# EAGLE board Advika30_CLEAN (EAGLE 9.7.0)
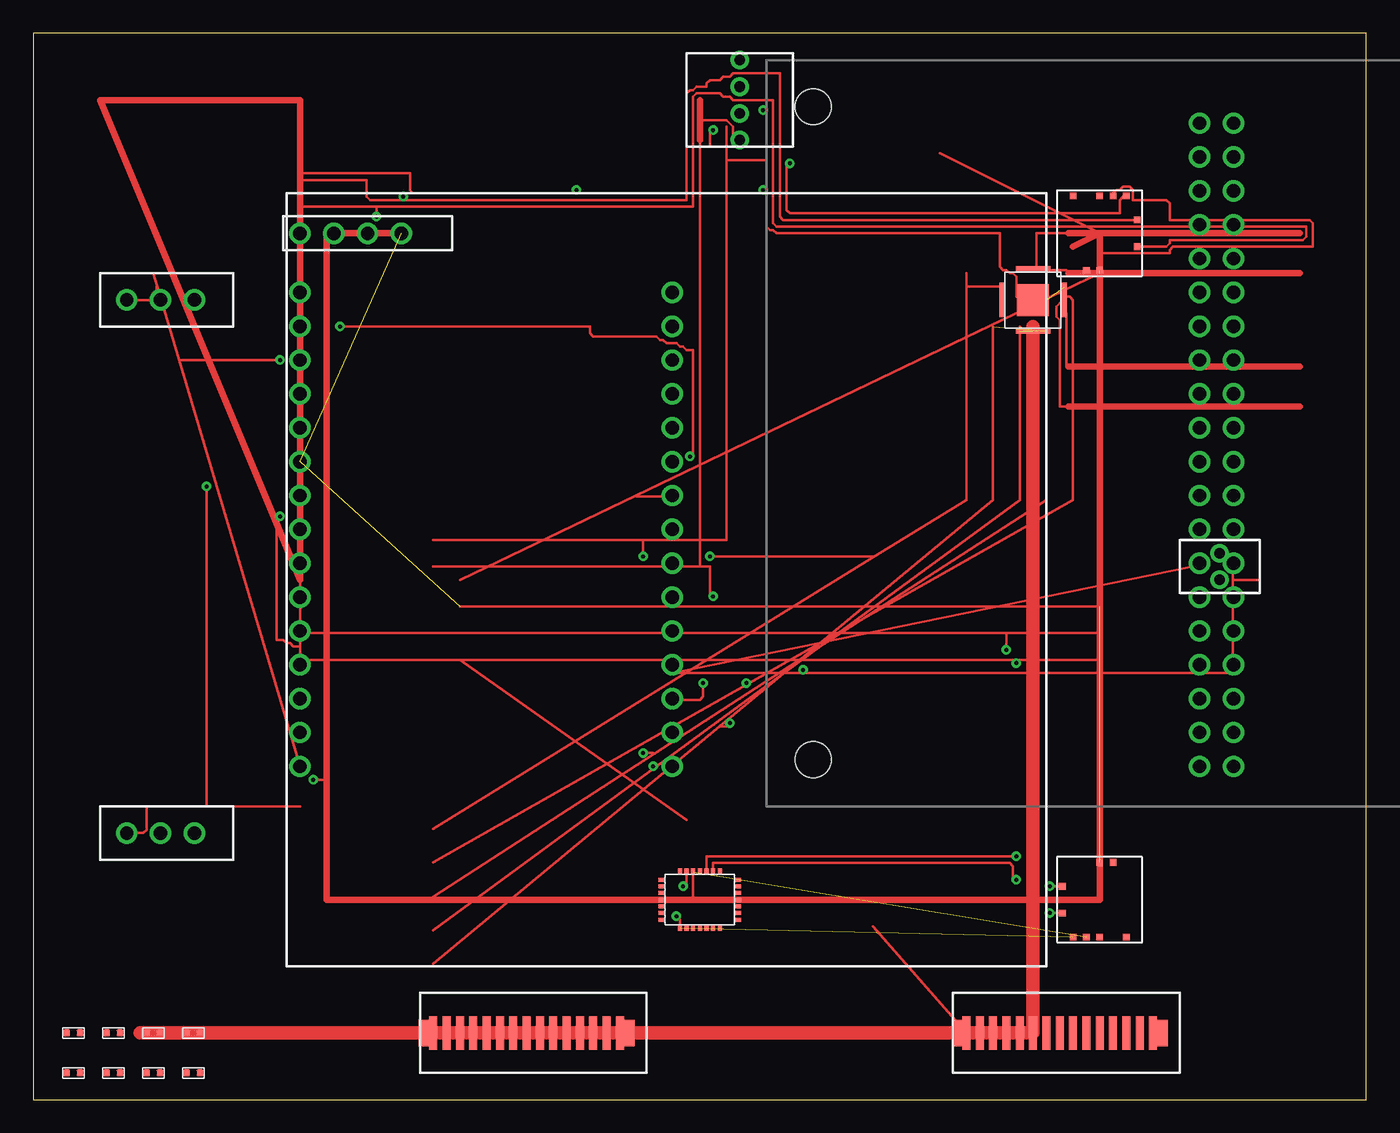
[diagram p0: board, top side]
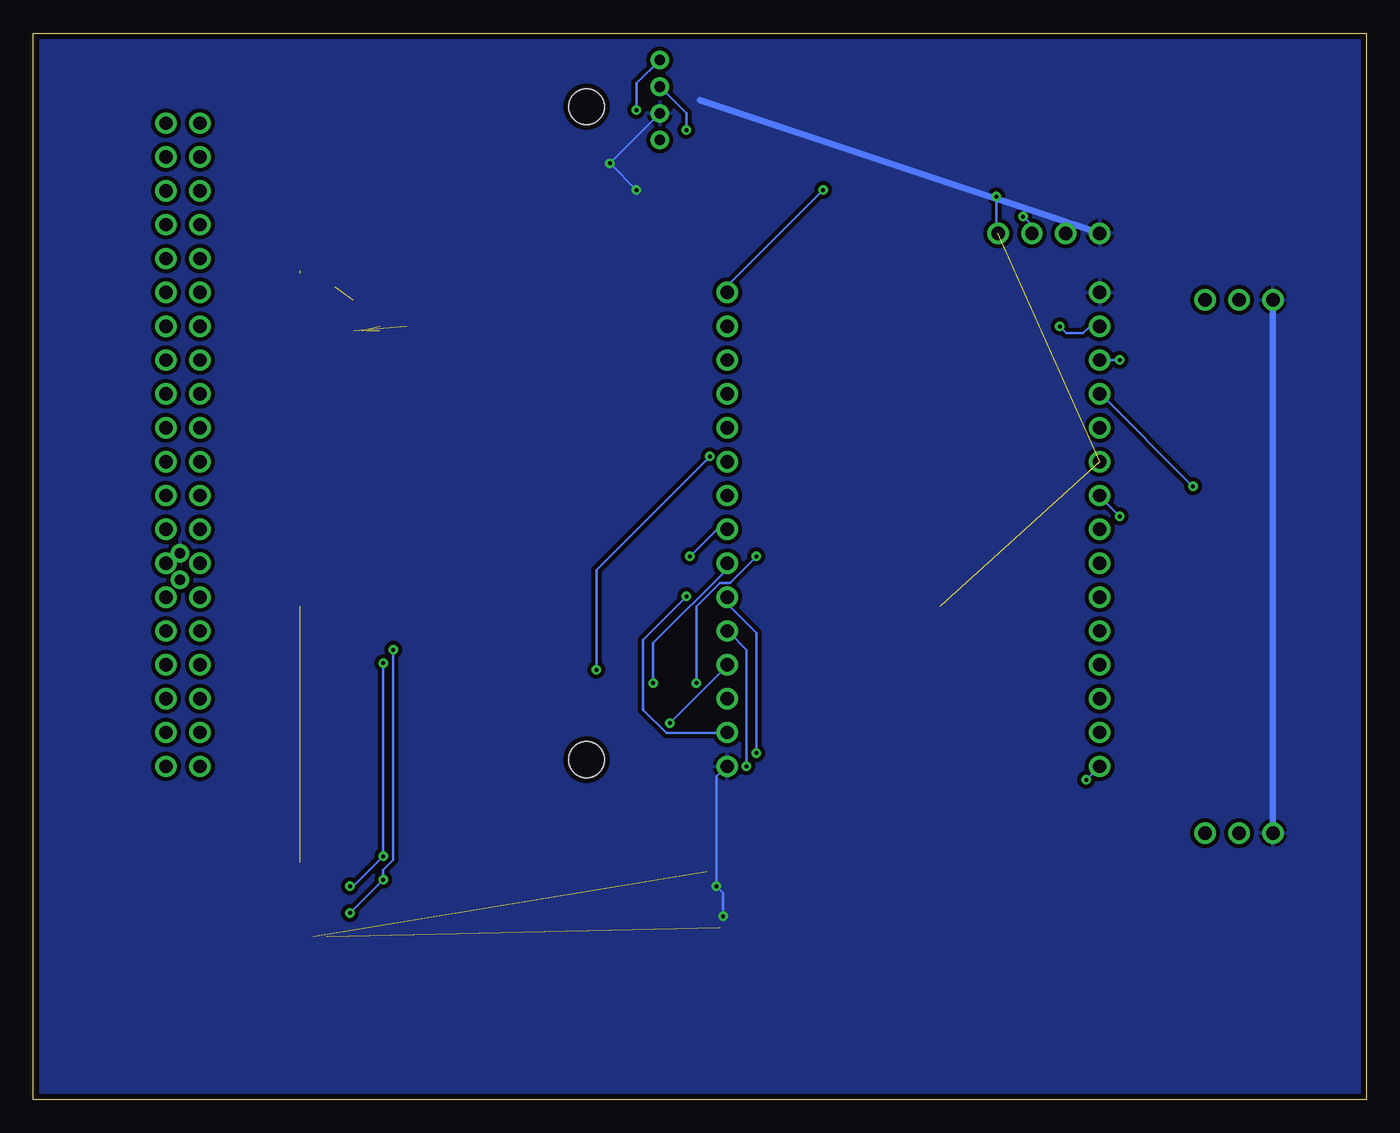
[diagram p1: board, bottom side, seen from below]

Size 100 x 80 mm. Coordinates in mm from the lower left corner, seen from the top.
Outline: 0,0 100,0 100,80 0,80 0,0
Copper layers (1*16): Top 0.035mm / dielectric 1.5mm / Bottom 0.035mm
Design rules "Advika3-DRules": minimum track width 0.2mm, minimum drill 0.3mm, track to track 0.15mm, track to pad 0.15mm, pad to pad 0.15mm, via to via 0.15mm, smd to smd 0.15mm, copper to edge 15mil, drill to drill 6mil, minimum pad ring 10mil, minimum via ring 8mil, stop-mask expansion 4mil, vias tented up to drill 9999mil, thermal gap 10mil
Net classes: 1 power: width 0.5 mm, drill 0.3 mm; 2 signal: width 0.2 mm, drill 0.3 mm

## Footprints (pad centres in the part's own frame; a part is rotated, then mirrored left to right if it is on the bottom)
0402 = smd 0.5 x 0.5: 1 -0.5,0; 2 0.5,0
JST-PH4 = drill 0.8 pad 1.4: 1 3,-3; 2 3,-1; 3 3,1; 4 3,3
FPC15 = smd 0.6 x 2.5: 1 0,0; 2 1,0; 3 2,0; 4 3,0; 5 4,0; 6 5,0; 7 6,0; 8 7,0; 9 8,0; 10 9,0; 11 10,0; 12 11,0; 13 12,0; 14 13,0; 15 14,0 | smd 1.2 x 2: MT1 -0.5,0; MT2 14.5,0
HDR4-I2C = drill 1 pad 1.6: 1 0,0; 2 2.54,0; 3 5.08,0; 4 7.62,0
JST-PH2 = drill 0.8 pad 1.4: 1 2,-1; 2 2,1
SW3PIN = drill 1 pad 1.6: 1 0,0; 2 2.54,0; 3 5.08,0
RPI5-MOUNT = drill 1 pad 1.6: GPIO1 32.5,3; GPIO2 35.04,3; GPIO3 32.5,5.54; GPIO4 35.04,5.54; GPIO5 32.5,8.08; GPIO6 35.04,8.08; GPIO7 32.5,10.62; GPIO8 35.04,10.62; GPIO9 32.5,13.16; GPIO10 35.04,13.16; GPIO11 32.5,15.7; GPIO12 35.04,15.7; GPIO13 32.5,18.24; GPIO14 35.04,18.24; GPIO15 32.5,20.78; GPIO16 35.04,20.78; GPIO17 32.5,23.32; GPIO18 35.04,23.32; GPIO19 32.5,25.86; GPIO20 35.04,25.86; GPIO21 32.5,28.4; GPIO22 35.04,28.4; GPIO23 32.5,30.94; GPIO24 35.04,30.94; GPIO25 32.5,33.48; GPIO26 35.04,33.48; GPIO27 32.5,36.02; GPIO28 35.04,36.02; GPIO29 32.5,38.56; GPIO30 35.04,38.56; GPIO31 32.5,41.1; GPIO32 35.04,41.1; GPIO33 32.5,43.64; GPIO34 35.04,43.64; GPIO35 32.5,46.18; GPIO36 35.04,46.18; GPIO37 32.5,48.72; GPIO38 35.04,48.72; GPIO39 32.5,51.26; GPIO40 35.04,51.26 | hole 2.7: 3.5,3.5; 3.5,52.5; 61.5,3.5; 61.5,52.5
ESP32-S3-DEVKIT = drill 1 pad 1.6: L1 0,0; L2 0,2.54; L3 0,5.08; L4 0,7.62; L5 0,10.16; L6 0,12.7; L7 0,15.24; L8 0,17.78; L9 0,20.32; L10 0,22.86; L11 0,25.4; L12 0,27.94; L13 0,30.48; L14 0,33.02; L15 0,35.56; R1 27.94,0; R2 27.94,2.54; R3 27.94,5.08; R4 27.94,7.62; R5 27.94,10.16; R6 27.94,12.7; R7 27.94,15.24; R8 27.94,17.78; R9 27.94,20.32; R10 27.94,22.86; R11 27.94,25.4; R12 27.94,27.94; R13 27.94,30.48; R14 27.94,33.02; R15 27.94,35.56
QFN16-4X4 = smd 0.65 x 0.35: 1 -0.975,-2.35; 2 -0.325,-2.35; 3 0.325,-2.35; 4 0.975,-2.35; 9 0.975,2.35; 10 0.325,2.35; 11 -0.325,2.35; 12 -0.975,2.35 | smd 0.35 x 0.65: 5 2.35,-0.975; 6 2.35,-0.325; 7 2.35,0.325; 8 2.35,0.975; 13 -2.35,0.975; 14 -2.35,0.325; 15 -2.35,-0.325; 16 -2.35,-0.975 | smd 2.4 x 2.4: 17 0,0
LGA28-5X4 = smd 0.3 x 0.5: ADDR -1.5,2.1; BOOT_LOAD_PIN 0.5,-2.1; GND -1.5,-2.1; GND2 -1,2.1; GNDIO -1,-2.1; INT 1,-2.1; NC1 1.5,2.1; NRST 1.5,-2.1; PS0 -0.5,-2.1; PS1 0,-2.1; SCL 1,2.1; SDA 0.5,2.1; VDD -0.5,2.1; VDDIO 0,2.1 | smd 0.5 x 0.3: BL_IND -2.85,1; GND3 -2.85,1.5; GND4 2.85,-1.5; GND5 2.85,-1; GND6 2.85,-0.5; GND7 2.85,0; GND8 2.85,0.5; GND9 2.85,1; GND10 2.85,1.5; NC2 -2.85,-1.5; NC3 -2.85,-1; NC4 -2.85,-0.5; NC5 -2.85,0; NC6 -2.85,0.5
VL53L5CX = smd 0.5 x 0.5: AVDD 0,-2.8; GND1 -2,-2.8; GND2 1,2.8; GPIO1 2,-2.8; INT 0,2.8; SCL -2.8,-1; SDA -2.8,1; VDD -1,-2.8

## Placement (x,y rotation side)
C1  100nF  [0402]  3,2 0 top
C2  100nF  [0402]  6,2 0 top
C3  100nF  [0402]  9,2 0 top
C4  100nF  [0402]  12,2 0 top
J1  YDLIDAR-X4  [JST-PH4]  50,75 0 top
J2  PI-CAM-CSI0  [FPC15]  30,5 0 top
J3  PI-CAM-CSI1  [FPC15]  70,5 0 top
J4  SSD1306-OLED  [HDR4-I2C]  20,65 0 top
J5  E-STOP  [JST-PH2]  87,40 0 top
J6  BUMPER-SW1  [SW3PIN]  7,20 0 top
J7  BUMPER-SW2  [SW3PIN]  7,60 0 top
J8  RPI5  [RPI5-MOUNT]  55,22 0 top
R1  4K7  [0402]  3,5 0 top
R2  4K7  [0402]  6,5 0 top
R3  4K7  [0402]  9,5 0 top
R4  4K7  [0402]  12,5 0 top
U2  ESP32-S3-DevKitC-1  [ESP32-S3-DEVKIT]  20,25 0 top
U3  DRV8833  [QFN16-4X4]  75,60 0 top
U4  BNO055  [LGA28-5X4]  50,15 0 top
U5  VL53L5CX  [VL53L5CX]  80,15 0 top
U6  VL53L5CX  [VL53L5CX]  80,65 180 top

## Library data of the parts
C1-C4 R1-R4 = advika30
J1 = advika30; MPN: PHR-4
J2 J3 = advika30; MPN: FH33J-15S-0.5SH
J4 = advika30; MPN: SSD1306
J5 = advika30; MPN: E-STOP-NC
J6 J7 = advika30; MPN: SS-5GL
J8 = advika30; MPN: SC1112
U2 = advika30; MPN: ESP32-S3-DevKitC-1-N8R8
U3 = advika30; MPN: DRV8833PWP
U4 = advika30; MPN: BNO055
U5 U6 = advika30; MPN: VL53L5CX

## Nets
3V3_MCU: J4.2 U2.L1 U4.VDD U5.VDD U6.VDD
5V_LIDAR: J1.1
5V_MAIN: U2.R15
BUMP1: J6.2 U2.L12
BUMP2: J7.2 U2.L13
ESTOP: J5.1 U2.L14
GND: J1.2 J4.1 J5.2 J6.1 J7.1 U2.L15 U2.R1 U3.17 U4.GND U4.GND2 U5.GND1 U6.GND1
I2C_SCL: J4.4 U2.L10 U4.SCL U5.SCL U6.SCL
I2C_SDA: J4.3 U2.L9 U4.SDA U5.SDA U6.SDA
LIDAR_RX: J1.4 U2.R3
LIDAR_TX: J1.3 U2.R2
MOTOR_AOUT1: U3.5
MOTOR_AOUT2: U3.6
MOTOR_BOUT1: U3.9
MOTOR_BOUT2: U3.10
MTR_AIN1: U2.R4 U3.4
MTR_AIN2: U2.R5 U3.3
MTR_BIN1: U2.R6 U3.8
MTR_BIN2: U2.R7 U3.7
MTR_NSLEEP: U2.R8 U3.13
TOF1_INT: U2.L10 U5.INT
TOF2_INT: U2.R9 U6.INT
VM_MOTOR: U3.1

## Tracks (layer width: path | path; a pad name or v marks a point on that pad's centre or on a via)
3V3_MCU  (via drill 0.3)  (1 unrouted)
  Top 0.2: 49.5,15 U4.VDD | 80,63.5 85.25,63.5 85.25,63.75 85.5,64 96,64 96,65.75 95.75,66 85.25,66 85.25,67.25 85,67.5 82.5,67.5 82.5,68.25 82.25,68.5 81.75,68.5 81.5,68.25 81.25,68.25 81,68 U6.VDD | 22,24 v21,24
  Top 0.5: 28,65 J4.2 22.5,65 22,65 22,39 22,24 22,15 49.5,15 80,15 80,63.5 80,65 78,64 | 49,15 50,15
  Bottom 0.2: v21,24 U2.L1
5V_LIDAR
  Top 0.2: 50,73.5 52,73.5 52.5,73 52.5,72 J1.1
  Top 0.5: 50,72 50,73.5 50,75
5V_MAIN  (via drill 0.3)
  Top 0.2: v40.75,68.25 40.5,68 28.5,68 28.25,68.25 28.25,69.5 20,69.5
  Top 0.5: 5,75 20,75 20,69.5 20,39 5,75
  Bottom 0.2: v40.75,68.25 47.75,61.25 47.75,60.75 U2.R15
BUMP1  (via drill 0.3)
  Top 0.2: 20,22 13,22 | 13,22 8.5,22 8.5,20.25 8.25,20 7.54,20 | v13,46 13,22
  Bottom 0.2: v13,46 20,53 U2.L12
BUMP2  (via drill 0.3)
  Top 0.2: 20,25 10.94,55.48 | 10.94,55.48 9.29,61.01 | 9.29,61.01 9,62 | 7.54,60 8.75,60 9,60.25 9,60.5 9.25,60.75 9.25,61 9.29,61.01 | v18.5,55.5 11,55.5 10.94,55.48
  Bottom 0.2: v18.5,55.5 20,55.5 U2.L13
ESTOP  (via drill 0.3)
  Top 0.2: 57.75,32 48,32 87,40 | 57.75,32 90,32 90,39 | 90,39 90,40 | 90,39 92,39 | v57.75,32.25 57.75,32 | v49.25,48.25 49.5,48.5 49.5,56.25 49,56.25 48.75,56.5 48.5,56.5 48.25,56.75 47.5,56.75 47.25,57 47,57 46.75,57.25 42,57.25 41.75,57.5 41.75,58 v23,58
  Bottom 0.2: v57.75,32.25 57.75,39.75 v49.25,48.25 | v23,58 22.5,57.5 21.25,57.5 20.75,58 20,58 U2.L14
GND  (via drill 0.3)  (1 unrouted)
  Top 0.2: U4.GND 48.5,13.5 v48.25,13.75 | v48.75,16 49,16.25 U4.GND2 | v56.75,70.25 56.5,70.25 56.5,66.75 56.75,66.5 81.5,66.5 81.5,67.5 81.75,67.75 82,67.75 U6.GND1 | U3.17 74,60 73.75,60.25 73.75,61.75 73.5,62 73.25,62 73,62.25 72.75,62.25 72.5,62.5 72.5,65 55.75,65 55.5,65.25 55.25,65.25 55,65.5 55,68.25 v54.75,68.25
  Bottom 0.2: v48.25,13.75 48.25,15.5 v48.75,16 48.75,24.25 48,25 U2.R1 | J1.2 v56.75,70.25 v54.75,68.25
  Bottom 0.5: J6.1 J7.1 | J4.1 50,75
  pour Bottom (isolate 0.3): 0.5,0.5 99.5,0.5 99.5,79.5 0.5,79.5
I2C_SCL  (via drill 0.3)  (1 unrouted)
  Top 0.2: 73,35 20,35 20,69 25,69 25,67.75 25.25,67.5 27.75,67.5 | 73,35 80,35 80,61 | U4.SCL 51,17.75 73.25,17.75 73.5,17.5 73.5,16.5 v73.75,16.5 | U5.SCL v76.25,14 | U6.SCL 56.25,66 56,66.25 56,77 52.5,77 52.25,76.75 51.75,76.75 51.5,76.5 50.75,76.5 50.5,76.25 50.5,76 49.75,76 49.5,75.75 49.25,75.75 49,75.5 49,67.5 27.75,67.5 | 27.75,67.5 v27.75,67.75 | 73,35 v73,33.75 | 70,5 63,13
  Bottom 0.2: v76.25,14 v73.75,16.5 73.75,17.25 73,18 v73,33.75 | v27.75,67.75 27.75,65 J4.4
I2C_SDA  (via drill 0.3)
  Top 0.2: 73.75,33 20,33 20,34 | 73.75,33 80,33 80,63 | 20,34 20,67 25.75,67 | U4.SDA 50.5,18.25 v73.75,18.25 | U5.SDA v76.25,16 | U6.SDA 85,64 85.25,64.25 85.25,64.5 95.25,64.5 95.5,64.75 95.5,65.5 55.75,65.5 55.5,65.75 55.5,75 52.5,75 52.25,75.25 51.75,75.25 51.5,75.5 49.75,75.5 49.5,75.25 49.5,67 25.75,67 | v18.5,43.75 18.25,43.5 18.25,34.5 18.75,34.5 19,34.25 19.25,34.25 19.5,34 20,34 | 25.75,67 v25.75,66.25 | 73.75,33 v73.75,32.75 | 32,33 49,21 | 80,65 68,71
  Bottom 0.2: v76.25,16 76,16 v73.75,18.25 v73.75,32.75 | v18.5,43.75 20,45.25 U2.L9 | v25.75,66.25 25.25,65.75 25.25,65 J4.3
LIDAR_RX  (via drill 0.3)
  Top 0.2: 30,42 45.75,42 | 45.75,42 52,42 52,70.5 | 52,70.5 52,73 | v54.75,74.25 55,74 55,70.5 52,70.5 | v50.25,31.25 50.25,30.25 50,30 48,30 U2.R3 | 45.75,42 v45.75,40.75
  Bottom 0.2: J1.4 54.75,76.25 v54.75,74.25 | v50.25,31.25 50.25,37 48.5,38.75 47.75,38.75 v45.75,40.75
LIDAR_TX  (via drill 0.3)
  Top 0.2: 30,40 50,40 | 50,40 50,71.5 | 50,71.5 50,73 | v51,72.75 50.75,72.5 50.75,71.5 50,71.5 | v51,37.75 50.75,38 50.75,40 50,40
  Bottom 0.2: J1.3 51,74 v51,72.75 | v51,37.75 54.25,34.5 54.25,29.25 52.5,27.5 48,27.5 U2.R2
MOTOR_AOUT1
  Top 0.2: U3.5 77.5,59 77.5,55 77.65,55
  Top 0.5: 77.65,55 95,55
MOTOR_AOUT2
  Top 0.2: 77.65,52 77,52 77,58.5 76.75,58.75 76.75,59.5 77,59.75 77.25,59.75 U3.6
  Top 0.5: 77.65,52 95,52
MOTOR_BOUT1
  Top 0.2: 77.75,62 77.5,62.25 76,62.25 U3.9
  Top 0.5: 77.65,62 77.75,62 95,62
MOTOR_BOUT2
  Top 0.2: 77.65,65 75.25,65 75.25,62.5 U3.10
  Top 0.5: 77.65,65 95,65
MTR_AIN1  (via drill 0.3)  (1 unrouted)
  Top 0.2: 30,10.2 51.49,28.01 | 51.49,28.01 72,45 72,58 | v52.25,28.25 52,28 51.5,28 51.49,28.01
  Bottom 0.2: v52.25,28.25 48,32.5 U2.R4
MTR_AIN2  (via drill 0.3)  (1 unrouted)
  Top 0.2: 30,12.7 46.75,25 | 46.75,25 74,45 74,58 | v46.5,25 46.75,25
  Bottom 0.2: v46.5,25 46.5,33.75 47.75,35 U2.R5
MTR_BIN1  (via drill 0.3)  (1 unrouted)
  Top 0.2: 30,15.2 46.55,25.92 | 46.55,25.92 76,45 76,60 | v45.75,26 46.5,26 46.55,25.92
  Bottom 0.2: v45.75,26 45.75,35 47.75,37 47.75,37.5 U2.R6
MTR_BIN2  (via drill 0.3)
  Top 0.2: 30,17.8 53.75,31.26 | 53.75,31.26 78,45 78,60 77.75,60.25 77.5,60.25 U3.7 | v53.5,31.25 53.75,31.25 53.75,31.26
  Bottom 0.2: v53.5,31.25 53.5,34.25 47.75,40 U2.R7
MTR_NSLEEP  (via drill 0.3)
  Top 0.2: 30,20.3 63.03,40.7 | 63.03,40.7 70,45 70,61 | 70,61 70,62 | 70,61 72.5,61 U3.13 | v50.75,40.75 63,40.75 63.03,40.7
  Bottom 0.2: v50.75,40.75 48.75,42.75 48,42.75 U2.R8
TOF1_INT  (2 unrouted)
  Top 0.2: 32,37 80,37
TOF2_INT  (1 unrouted)
  Top 0.2: 32,39 45.21,45.33 | 45.21,45.33 80,62 | U2.R9 47.75,45.25 45.25,45.25 45.21,45.33
VM_MOTOR  (1 unrouted)
  Top 1: 8,5 75,5 | 75,5 75,57.65 | 75,5 75,58

## Text on the board
Document: ADVIKA 3.0 MAIN PCB - 100x80mm 2-Layer FR4 | Rev 1.0 ESP32-S3 Carrier + Sensor Hub | --- POWER --- | --- MCU: ESP32-S3 --- | --- MOTOR DRIVER --- | --- SENSORS --- | --- CONNECTORS ---